# Altium PCB MagnetorquerFinalBoard.PcbDoc
Units mm, origin at the board's own origin, x right, y up, seen from the top; angles counter-clockwise.
Board outline 90.17 x 95.88 mm, 4 copper layers (F.Cu, In1.Cu, In2.Cu, B.Cu); 63 components, 137 nets, 364 pads, 76 vias.
Unrouted connection lines stored in the file: 51.
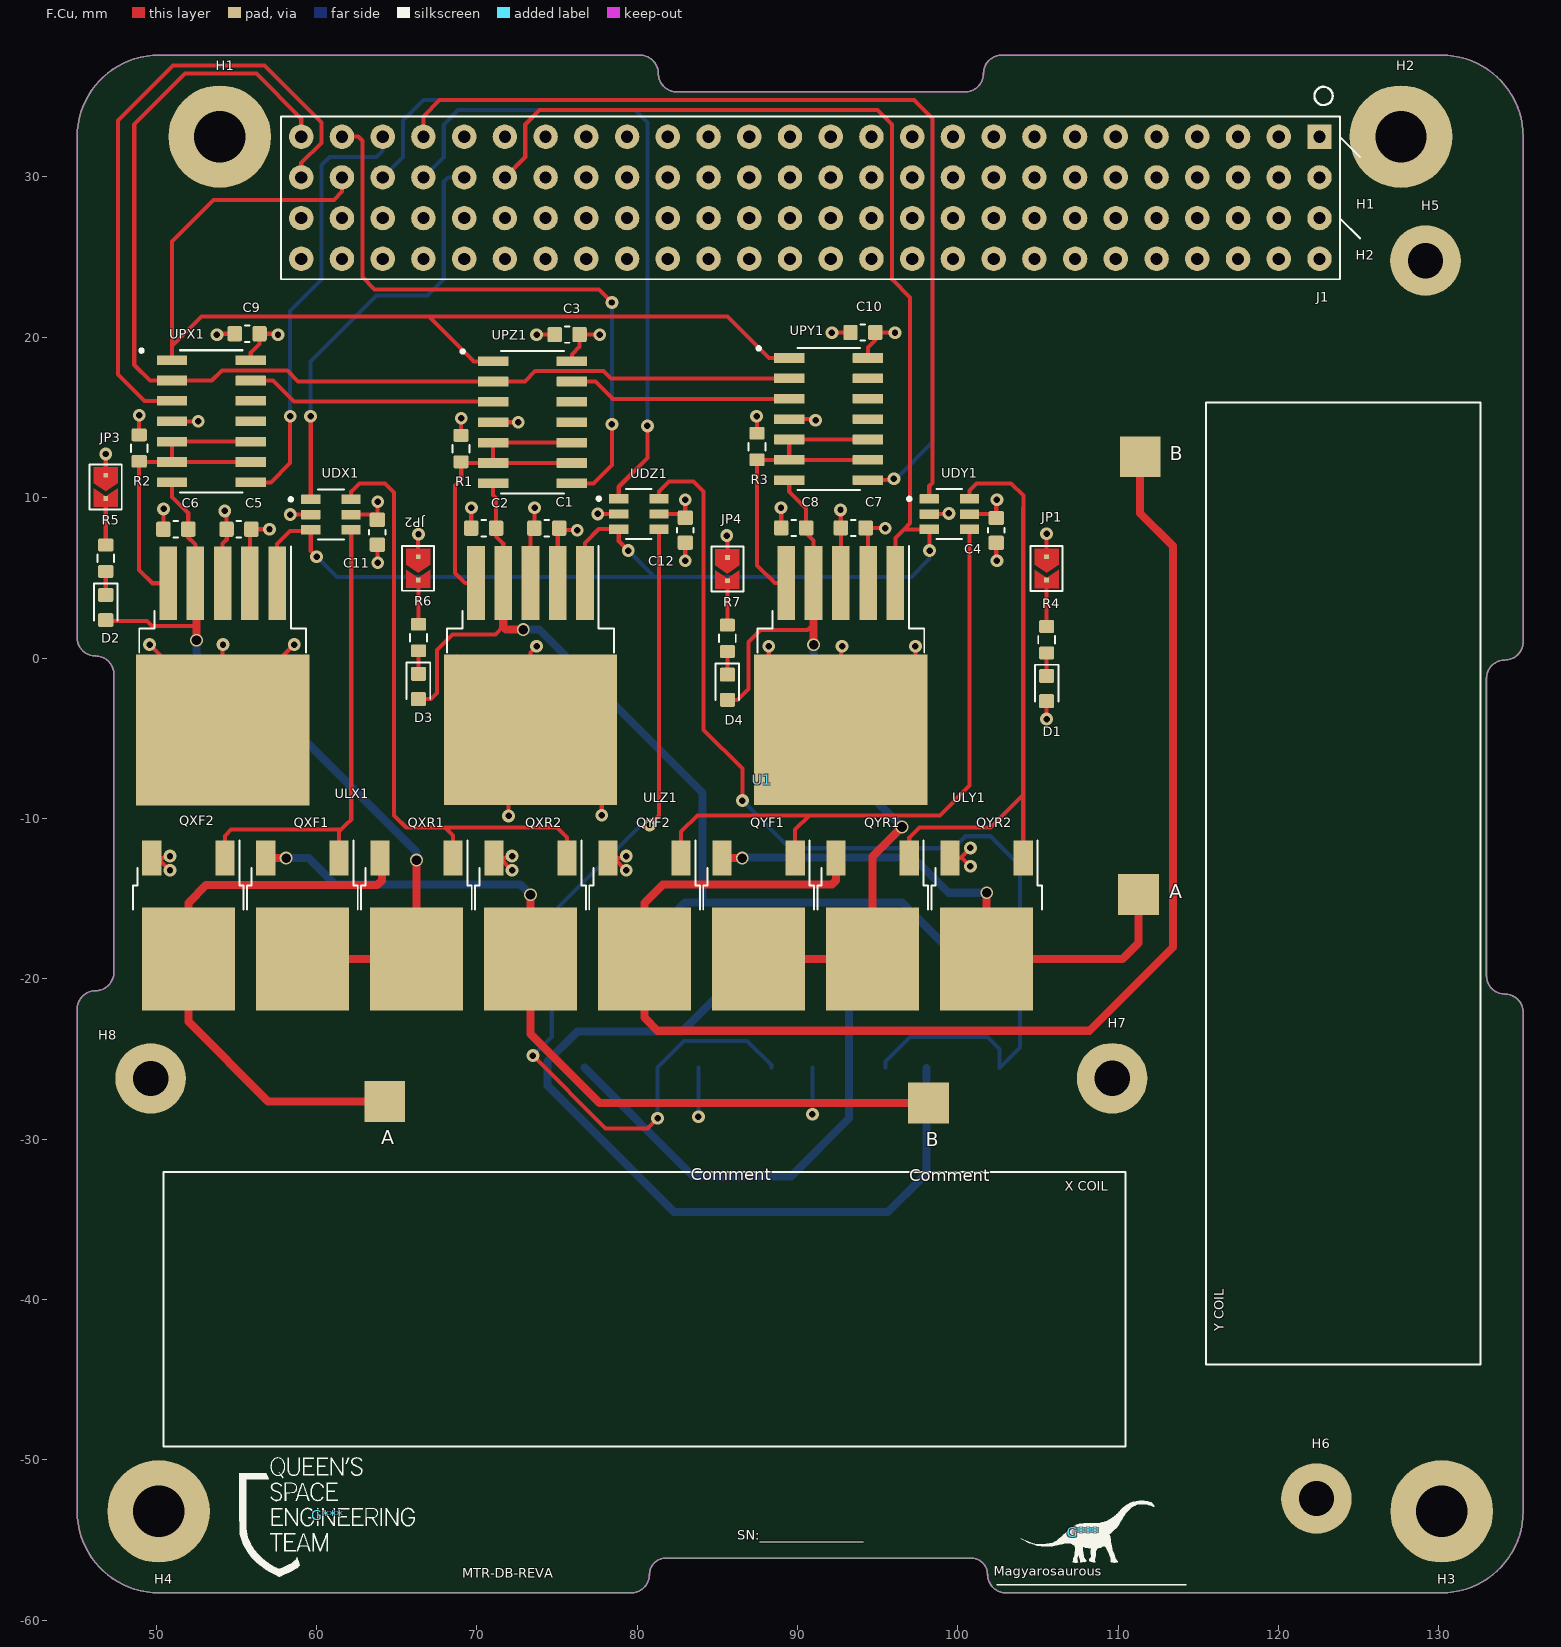
[diagram p0: F.Cu view]
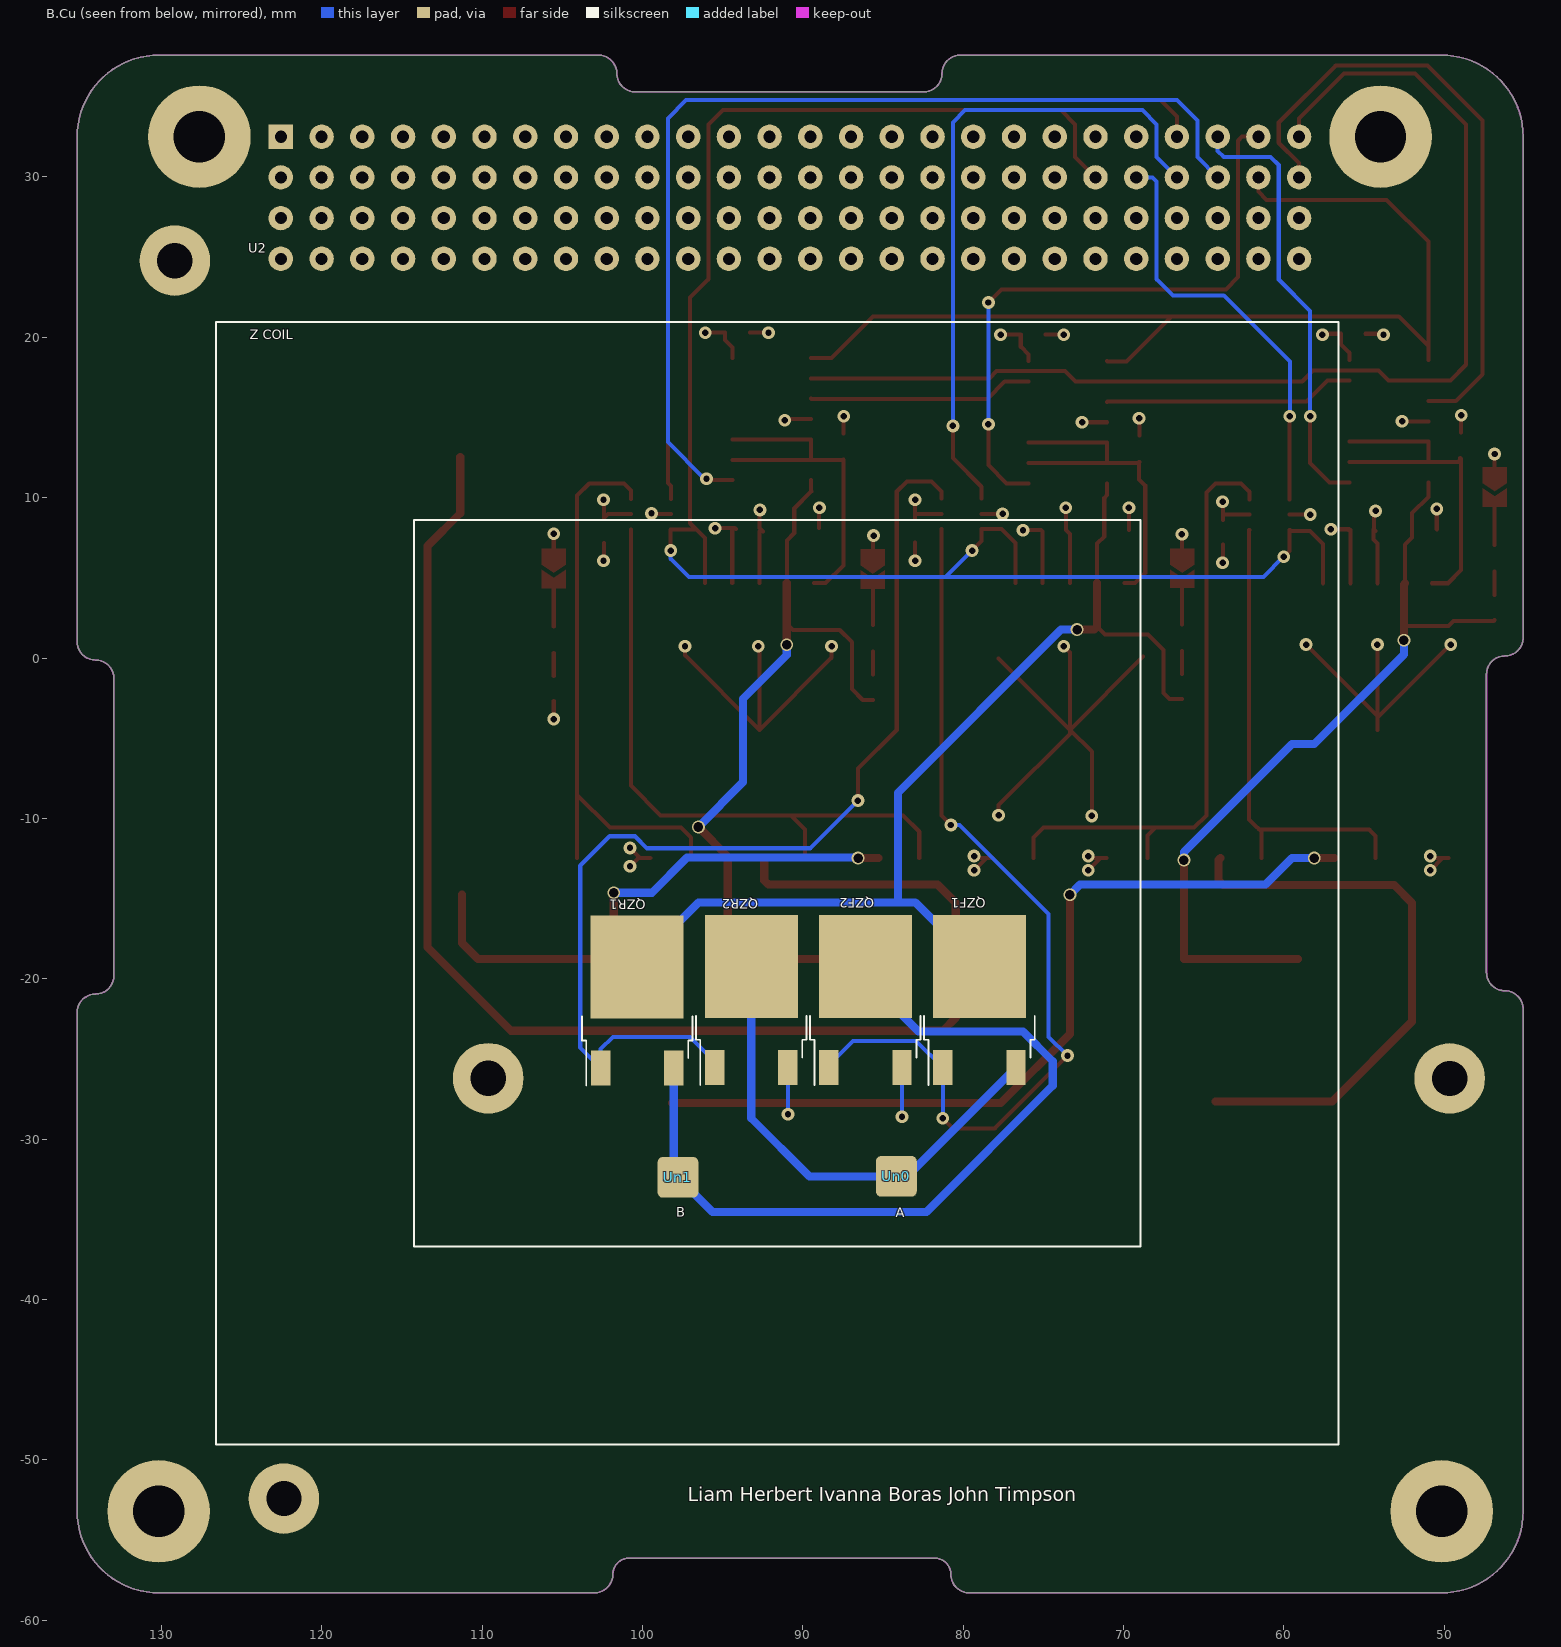
[diagram p1: B.Cu view, seen from below]
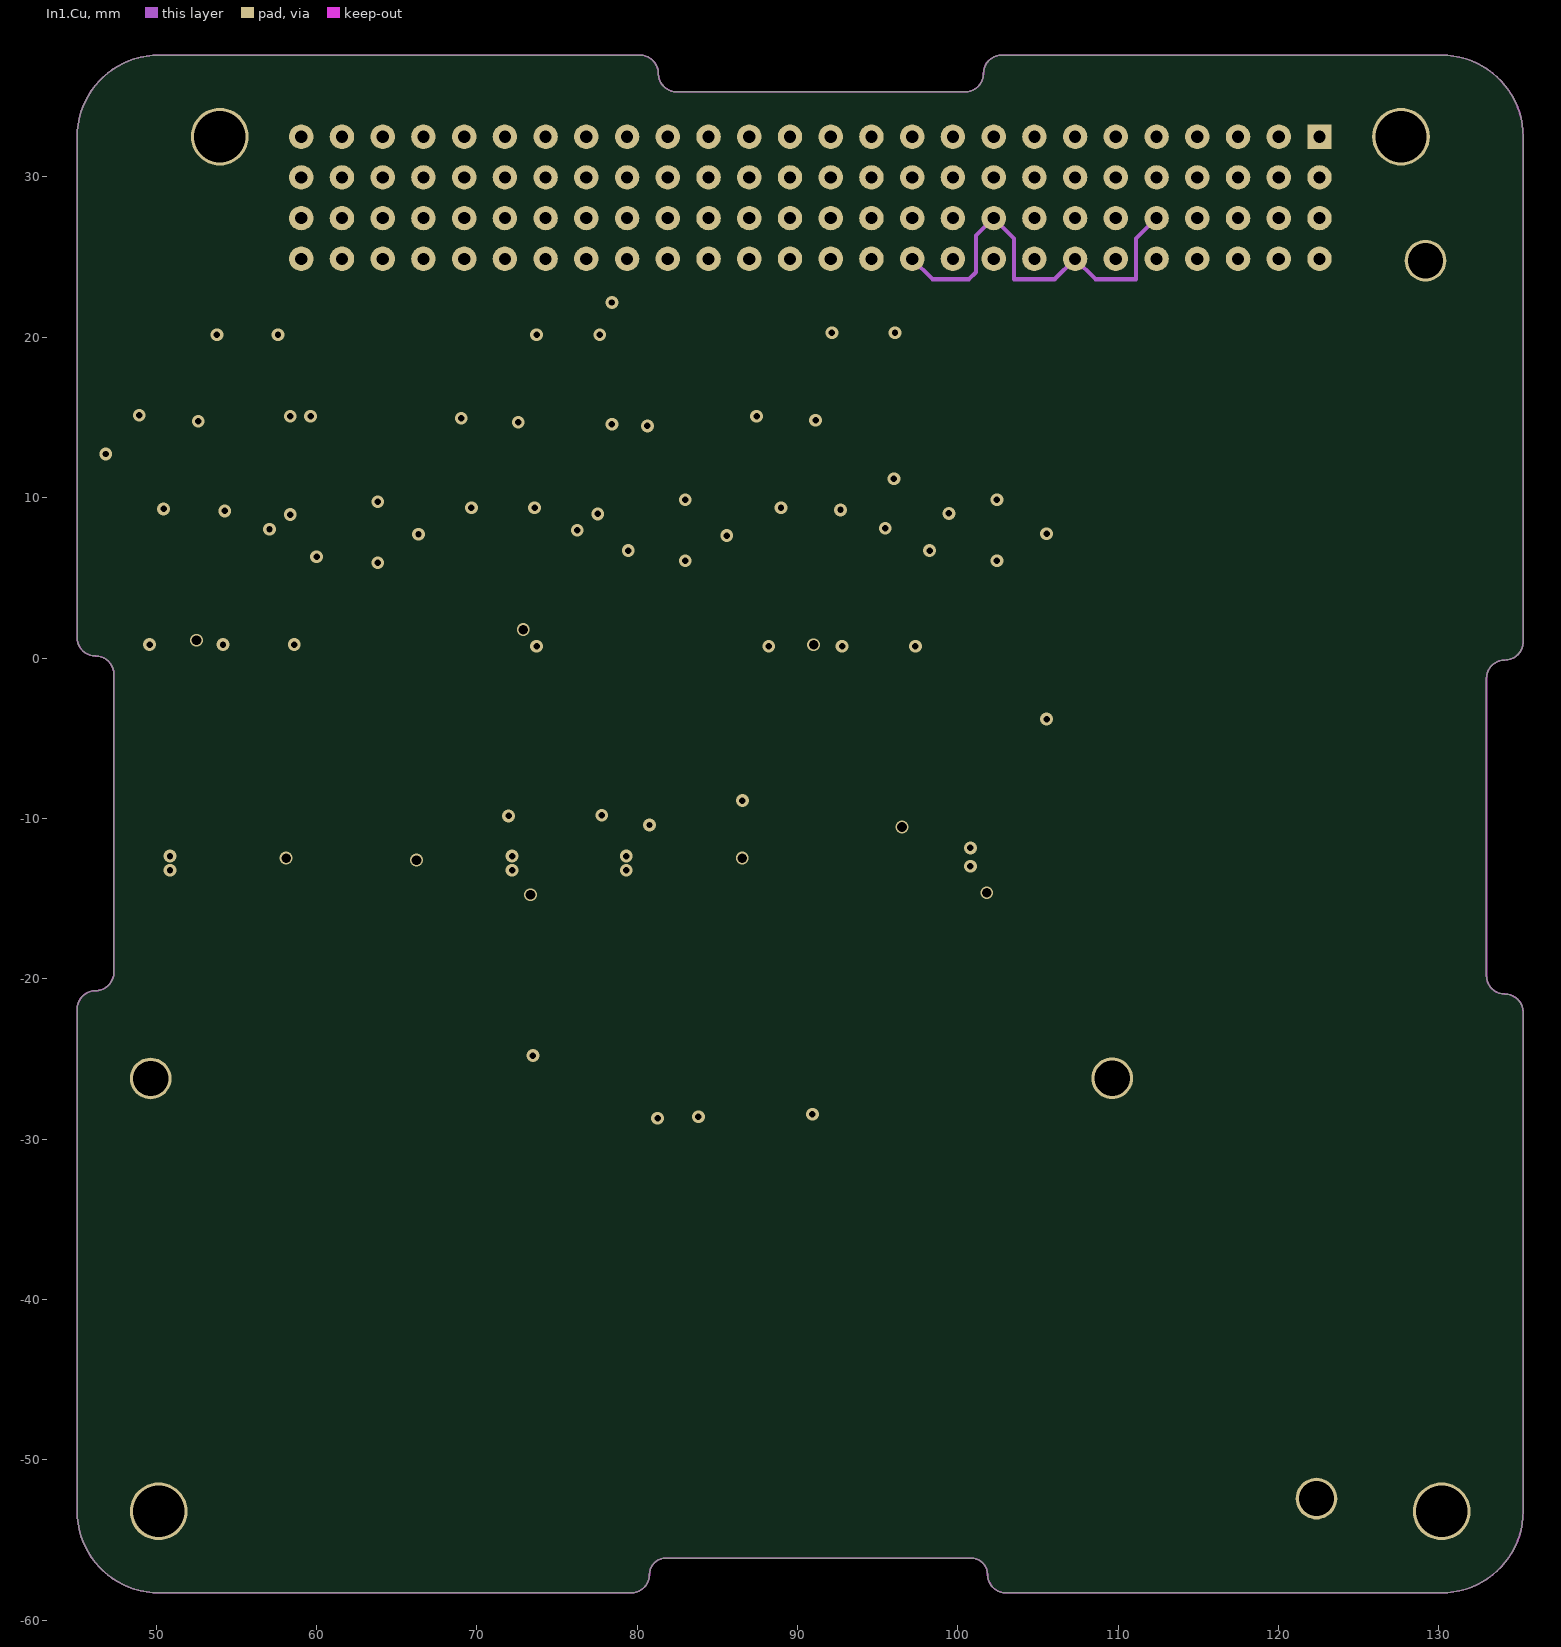
[diagram p2: In1.Cu]

## Layer stack, top to bottom
F.Mask: solder mask 0.0102, Solder Resist, Dk 3.5
F.Cu: signal copper 0.0356
Dielectric 1: dielectric 0.32, FR-4, Dk 4.8
In1.Cu: signal copper 0.0356
Dielectric2: dielectric 0.32, FR-4, Dk 4.8
In2.Cu: signal copper 0.0356
Dielectric3: dielectric 0.32, FR-4, Dk 4.8
B.Cu: signal copper 0.0356
B.Mask: solder mask 0.0102, Solder Resist, Dk 3.5

## Board outline
45.085,1.27 45.085,32.512 cw(c50.165,32.512) 50.165,37.592 80.183,37.592 cw(c80.183,36.449) 81.326,36.449 ccw(c82.469,36.449) 82.469,35.306 100.457,35.306 ccw(c100.457,36.449) 101.6,36.449 cw(c102.743,36.449) 130.175,37.592 cw(c130.175,32.512) 135.255,32.512 135.255,1.016 cw(c134.112,1.016) 134.112,-0.127 ccw(c134.112,-1.27) 132.969,-1.27 132.969,-19.812 ccw(c134.111,-19.81) 134.113,-20.953 134.112,-20.955 cw(c134.112,-22.098) 135.255,-22.098 135.255,-53.213 cw(c130.175,-53.213) 130.175,-58.293 102.997,-58.293 cw(c102.997,-57.15) 101.854,-57.15 ccw(c100.838,-57.15) 100.838,-56.134 81.788,-56.134 ccw(c81.788,-57.15) 80.772,-57.15 cw(c79.629,-57.15) 79.629,-58.293 50.165,-58.293 cw(c50.165,-53.213) 45.085,-53.213 45.085,-21.89 cw(c46.228,-21.89) 46.228,-20.747 ccw(c46.228,-19.604) 47.371,-19.604 47.371,-1.016 ccw(c46.228,-1.016) 46.228,0.127 cw(c46.228,1.27) 45.085,1.27

## Design rules (kind name [scope] priority, off if disabled: settings)
Clearance "Clearence 0.508_Polygon" [InNamedPolygon('In1.Cu-GND') OR InNamedPolygon('In2.Cu-5V')] p1: gap=0.508 ignorepadtopadclearanceinfootprint=FALSE
MinimumSolderMaskSliver [All] p1: minsoldermaskwidth=0
PolygonConnect Polygon_In2.Cu-5V_ConnectDirect [IsNamedPolygon('In2.Cu-5V') vs IsVia] p1: connectstyle=Direct reliefconductorwidth=0.254 reliefentries=4 polygonreliefangle="90 Angle" airgapwidth=0.254
PolygonConnect Polygon_In2.Cu-5V_ConnectRelief45 [IsNamedPolygon('In2.Cu-5V') vs (IsThruPin or IsSMTPin) and (PadShape_AllLayers = 'Round')] p2: connectstyle=Relief reliefconductorwidth=0.508 reliefentries=4 polygonreliefangle="45 Angle" airgapwidth=0.508
PolygonConnect Polygon_In2.Cu-5V_ConnectRelief90 [IsNamedPolygon('In2.Cu-5V') vs (IsThruPin or IsSMTPin) and (PadShape_AllLayers <> 'Round')] p3: connectstyle=Relief reliefconductorwidth=0.508 reliefentries=4 polygonreliefangle="90 Angle" airgapwidth=0.508
PolygonConnect Polygon_In1.Cu-GND_ConnectDirect [IsNamedPolygon('In1.Cu-GND') vs IsVia] p4: connectstyle=Direct reliefconductorwidth=0.254 reliefentries=4 polygonreliefangle="90 Angle" airgapwidth=0.254
PolygonConnect Polygon_In1.Cu-GND_ConnectRelief45 [IsNamedPolygon('In1.Cu-GND') vs (IsThruPin or IsSMTPin) and (PadShape_AllLayers = 'Round')] p5: connectstyle=Relief reliefconductorwidth=0.508 reliefentries=4 polygonreliefangle="45 Angle" airgapwidth=0.508
PolygonConnect Polygon_In1.Cu-GND_ConnectRelief90 [IsNamedPolygon('In1.Cu-GND') vs (IsThruPin or IsSMTPin) and (PadShape_AllLayers <> 'Round')] p6: connectstyle=Relief reliefconductorwidth=0.508 reliefentries=4 polygonreliefangle="90 Angle" airgapwidth=0.508
RoutingVias [All] p1: holewidth=0.711 width=1.27 viastyle="Through Hole" minholewidth=0.711 minwidth=1.27 maxholewidth=0.711 maxwidth=1.27
SilkToSilkClearance [All] p1: silktosilkclearance=0
SilkToSolderMaskClearance [IsPad] p1: minsilkscreentomaskgap=0 clearancetoexposedcopper=TRUE
SolderMaskExpansion [All] p1: expansion=0.102 istentingtop=FALSE
Width [All] p1: maxlimit=10 minlimit=0.254 preferedwidth=0.254 minimp=50.000000 maximp=50.000000 favimp=50.000000
27 further rules are at their usual default settings.

## Components (designator, comment, footprint, x,y, rotation, side; value= is the part's Value field where it differs from the comment)
C1 "0.1u" C_0603_1608Metric 74.368,8.097 r180 top
C2 "10u" C_0603_1608Metric 70.431,8.097 r180 top
C3 "0.1u" C_0603_1608Metric 75.638,20.169 r180 top
C4 "0.1u" C_0603_1608Metric 102.395,7.957 r270 top
C5 "0.1u" C_0603_1608Metric 55.172,8.032 r180 top
C6 "10u" C_0603_1608Metric 51.235,8.032 r180 top
C7 "0.1u" C_0603_1608Metric 93.477,8.109 r180 top
C8 "10u" C_0603_1608Metric 89.765,8.109 r180 top
C9 "0.1u" C_0603_1608Metric 55.68,20.224 r180 top
C10 "0.1u" C_0603_1608Metric 94.083,20.301 r180 top
C11 "0.1u" C_0603_1608Metric 63.799,7.843 r270 top
C12 "0.1u" C_0603_1608Metric 83.004,7.97 r270 top
D1 "ORANGE" LED_0603_1608Metric 105.537,-1.905 r270 top
D2 "ORANGE" LED_0603_1608Metric 46.863,3.15 r270 top
D3 "ORANGE" LED_0603_1608Metric 66.367,-1.772 r270 top
D4 "ORANGE" LED_0603_1608Metric 85.631,-1.821 r270 top
G*** "LOGO" LOGO 107.821,-54.525 r0 top
G*** "LOGO" LOGO 60.706,-53.467 r0 top
H1 "MountingHole_Pad" MountingHole_3.2mm_M3_Pad_TopBottom 53.975,32.512 r0 top
H2 "MountingHole_Pad" MountingHole_3.2mm_M3_Pad_TopBottom 127.635,32.512 r0 top
H3 "MountingHole_Pad" MountingHole_3.2mm_M3_Pad_TopBottom 130.175,-53.213 r0 top
H4 "MountingHole_Pad" MountingHole_3.2mm_M3_Pad_TopBottom 50.165,-53.213 r0 top
H5 "MountingHole_Pad" MountingHole_2.2mm_M2_Pad_TopBottom 129.165,24.782 r0 top
H6 "MountingHole_Pad" MountingHole_2.2mm_M2_Pad_TopBottom 122.365,-52.418 r0 top
H7 "MountingHole_Pad" MountingHole_2.2mm_M2_Pad_TopBottom 109.625,-26.208 r0 top
H8 "MountingHole_Pad" MountingHole_2.2mm_M2_Pad_TopBottom 49.665,-26.218 r0 top
J1 "PC104_Connector" pc104-connector 92.075,29.972 r270 top
JP1 "SolderJumper_2_Open" SolderJumper-2_P1.3mm_Open_TrianglePad1.0x1.5mm 105.537,5.588 r270 top
JP2 "SolderJumper_2_Open" SolderJumper-2_P1.3mm_Open_TrianglePad1.0x1.5mm 66.348,5.594 r270 top
JP3 "SolderJumper_2_Open" SolderJumper-2_P1.3mm_Open_TrianglePad1.0x1.5mm 46.863,10.668 r270 top
JP4 "SolderJumper_2_Open" SolderJumper-2_P1.3mm_Open_TrianglePad1.0x1.5mm 85.631,5.545 r270 top
QXF1 "IRLR120N" TO-252-2#1 59.128,-16.668 r270 top
QXF2 "IRLR120N" TO-252-2#2 52.016,-16.668 r270 top
QXR1 "IRLR120N" TO-252-2#2 66.24,-16.668 r270 top
QXR2 "IRLR120N" TO-252-2#3 73.352,-16.668 r270 top
QYF1 "IRLR120N" TO-252-2#4 87.576,-16.668 r270 top
QYF2 "IRLR120N" TO-252-2#5 80.464,-16.668 r270 top
QYR1 "IRLR120N" TO-252-2#6 94.688,-16.668 r270 top
QYR2 "IRLR120N" TO-252-2#7 101.8,-16.668 r270 top
QZF1 "IRLR120N" TO-252-2#8 78.994,-21.336 r270 bottom
QZF2 "IRLR120N" TO-252-2#9 86.106,-21.336 r270 bottom
QZR1 "IRLR120N" TO-252-2#10 100.332,-21.371 r270 bottom
QZR2 "IRLR120N" TO-252-2#11 93.22,-21.336 r270 bottom
R1 "100k" R_0603_1608Metric 69.015,13.057 r270 top
R2 "100k" R_0603_1608Metric 48.949,13.093 r270 top
R3 "100k" R_0603_1608Metric 87.479,13.189 r270 top
R4 "2k2" R_0603_1608Metric 105.537,1.143 r90 top
R5 "2k2" R_0603_1608Metric 46.863,6.223 r90 top
R6 "2k2" R_0603_1608Metric 66.367,1.276 r90 top
R7 "2k2" R_0603_1608Metric 85.631,1.227 r90 top
U1 "X/Y_Coils" "Front Coils Mount" 132.47,20.947 r180 top
U2 "Z_Coil" ZCoil 126.59,20.955 r0 bottom
UDX1 "SN74LVC1G18DBVR" SOT95P280X145-6N 60.906,8.944 r0 top
UDY1 "SN74LVC1G18DBVR" SOT95P280X145-6N 99.474,8.974 r0 top
UDZ1 "SN74LVC1G18DBVR" SOT95P280X145-6N 80.112,8.986 r0 top
ULX1 "MIC29302WU" TO-263-5_TabPin3#1 54.156,-1.112 r270 top
ULY1 "MIC29302WU" TO-263-5_TabPin3#2 92.705,-1.101 r270 top
ULZ1 "MIC29302WU" TO-263-5_TabPin3#3 73.352,-1.101 r270 top
Un0 "Comment" ?#1 84.17,-32.325 r0 top
Un1 "Comment" ?#2 97.79,-32.385 r0 top
UPX1 "MCP42010" SOIC127P600X175-14N 53.451,14.763 r0 top
UPY1 "MCP42010" SOIC127P600X175-14N 91.943,14.901 r0 top
UPZ1 "MCP42010" SOIC127P600X175-14N 73.479,14.703 r0 top

## Footprints (in the part's own frame and the unit in brackets; to place one, negate y for a bottom-side part, rotate by r counter-clockwise, add the part's x,y. Pads: shape width x height; smd on the part's side, far side on the other; paste and mask are expansions set on the pad)
C_0603_1608Metric [mm]
  rrect25% 0.9x0.95 smd mask+0: 1(-0.775,0) 2(0.775,0)
  silkscreen extent -0.14,-0.51 0.14,0.51
"Front Coils Mount" [mm]
  rect 2.54x2.54 smd mask+0: 1(34.3,48.7) 2(68.2,48.6) 3(21.2,35.7) 4(21.1,8.4)
  silkscreen extent -0.12,5 82,70.12
LED_0603_1608Metric [mm]
  rrect25% 0.875x0.95 smd mask+0: 1(-0.787,0) 2(0.787,0)
  silkscreen extent -1.49,-0.73 0.8,0.73
LOGO [mm]
  silkscreen extent -3.93,-1.89 4.44,1.97
MountingHole_2.2mm_M2_Pad_TopBottom [mm]
  round 4.4 smd paste-4.4 mask+0: 1(0,0)
  round 4.4 smd far side paste-4.4 mask+0: 1(0,0)
  round 2.6 hole 2.2 paste-2539.97 mask+0: 1(0,0)
MountingHole_3.2mm_M3_Pad_TopBottom [mm]
  round 6.4 smd paste-6.4 mask+0: 1(0,0)
  round 6.4 smd far side paste-6.4 mask+0: 1(0,0)
  round 3.6 hole 3.2 paste-2539.97 mask+0: 1(0,0)
pc104-connector [mil]
  rect 60x60 hole 30 paste-99999 mask+0: 1(-100,1200)
  round 60 hole 30 paste-99999 mask+0: 2(0,1200) 3(-100,1100) 4(0,1100) 5(-100,1000) 6(0,1000) 7(-100,900) 8(0,900) 9(-100,800) 10(0,800) 11(-100,700) 12(0,700) 13(-100,600) 14(0,600) 15(-100,500) 16(0,500) 17(-100,400) 18(0,400) 19(-100,300) 20(0,300) 21(-100,200) 22(0,200) 23(-100,100) 24(0,100) 25(-100,0) 26(0,0) 27(-100,-100) 28(0,-100) 29(-100,-200) 30(0,-200) 31(-100,-300) 32(0,-300) 33(-100,-400) 34(0,-400) 35(-100,-500) 36(0,-500) 37(-100,-600) 38(0,-600) 39(-100,-700) 40(0,-700) 41(-100,-800) 42(0,-800) 43(-100,-900) 44(0,-900) 45(-100,-1000) 46(0,-1000) 47(-100,-1100) 48(0,-1100) 49(-100,-1200) 50(0,-1200) 51(-100,-1300) 52(0,-1300) 53(100,1200) 54(200,1200) 55(100,1100) 56(200,1100) 57(100,1000) 58(200,1000) 59(100,900) 60(200,900) 61(100,800) 62(200,800) 63(100,700) 64(200,700) 65(100,600) 66(200,600) 67(100,500) 68(200,500) 69(100,400) 70(200,400) 71(100,300) 72(200,300) 73(100,200) 74(200,200) 75(100,100) 76(200,100) 77(100,0) 78(200,0) 79(100,-100) 80(200,-100) 81(100,-200) 82(200,-200) 83(100,-300) 84(200,-300) 85(100,-400) 86(200,-400) 87(100,-500) 88(200,-500) 89(100,-600) 90(200,-600) 91(100,-700) 92(200,-700) 93(100,-800) 94(200,-800) 95(100,-900) 96(200,-900) 97(100,-1000) 98(200,-1000) 99(100,-1100) 100(200,-1100) 101(100,-1200) 102(200,-1200) 103(100,-1300) 104(200,-1300)
  silkscreen extent -150,-1350 250,1300
R_0603_1608Metric [mm]
  rrect25% 0.8x0.95 smd mask+0: 1(-0.825,0) 2(0.825,0)
  silkscreen extent -0.24,-0.52 0.24,0.52
SOIC127P600X175-14N [mm]
  rrect7% 1.9x0.6 smd mask+0: 1(-2.455,3.81) 2(-2.455,2.54) 3(-2.455,1.27) 4(-2.455,0) 5(-2.455,-1.27) 6(-2.455,-2.54) 7(-2.455,-3.81) 8(2.455,-3.81) 9(2.455,-2.54) 10(2.455,-1.27) 11(2.455,0) 12(2.455,1.27) 13(2.455,2.54) 14(2.455,3.81)
  silkscreen extent -4.45,-4.43 1.95,4.51
SolderJumper-2_P1.3mm_Open_TrianglePad1.0x1.5mm [mm]
  rect 0.3x0.3 smd paste-0.3 mask+0: 1(-0.725,0) 2(0.725,0)
  F.Cu region: 1.225,-0.75 0.075,-0.75 0.575,0 0.075,0.75 1.225,0.75
  F.Cu region: 0.275,0 -0.225,-0.75 -1.225,-0.75 -1.225,0.75 -0.225,0.75
  silkscreen extent -1.4,-1 1.4,1
SOT95P280X145-6N [mm]
  rrect7% 1.21x0.58 smd mask+0: 1(-1.255,0.95) 2(-1.255,0) 3(-1.255,-0.95) 4(1.255,-0.95) 5(1.255,0) 6(1.255,0.95)
  silkscreen extent -2.6,-1.56 0.8,1.56
TO-252-2#1 [mm]
  rect 2.2x1.2 smd mask+0: 1(-4.2,2.28) 3(-4.2,-2.28)
  rect 6.4x5.8 smd paste-6.4 mask+0: 2(2.1,0)
  rect 3.05x2.75 on Top Paste mask-3.05: Un1(0.425,1.525) Un2(3.775,1.525) Un3(3.775,-1.525) Un4(0.425,-1.525)
  silkscreen extent -5.3,-3.45 -0.97,3.45
TO-252-2#2 [mm]
  rect 2.2x1.2 smd mask+0: 1(-4.2,2.28) 3(-4.2,-2.28)
  rect 6.4x5.8 smd paste-6.4 mask+0: 2(2.1,0)
  rect 3.05x2.75 on Top Paste mask-3.05: Un1(0.425,-1.525) Un2(3.775,-1.525) Un3(0.425,1.525) Un4(3.775,1.525)
  silkscreen extent -5.3,-3.45 -0.97,3.45
TO-252-2#3 [mm]
  rect 2.2x1.2 smd mask+0: 1(-4.2,2.28) 3(-4.2,-2.28)
  rect 6.4x5.8 smd paste-6.4 mask+0: 2(2.1,0)
  rect 3.05x2.75 on Top Paste mask-3.05: Un1(3.775,1.525) Un2(3.775,-1.525) Un3(0.425,-1.525) Un4(0.425,1.525)
  silkscreen extent -5.3,-3.45 -0.97,3.45
TO-252-2#4 [mm]
  rect 2.2x1.2 smd mask+0: 1(-4.2,2.28) 3(-4.2,-2.28)
  rect 6.4x5.8 smd paste-6.4 mask+0: 2(2.1,0)
  rect 3.05x2.75 on Top Paste mask-3.05: Un1(0.425,-1.525) Un2(0.425,1.525) Un3(3.775,1.525) Un4(3.775,-1.525)
  silkscreen extent -5.3,-3.45 -0.97,3.45
TO-252-2#5 [mm]
  rect 2.2x1.2 smd mask+0: 1(-4.2,2.28) 3(-4.2,-2.28)
  rect 6.4x5.8 smd paste-6.4 mask+0: 2(2.1,0)
  rect 3.05x2.75 on Top Paste mask-3.05: Un1(3.775,1.525) Un2(0.425,1.525) Un3(0.425,-1.525) Un4(3.775,-1.525)
  silkscreen extent -5.3,-3.45 -0.97,3.45
TO-252-2#6 [mm]
  rect 2.2x1.2 smd mask+0: 1(-4.2,2.28) 3(-4.2,-2.28)
  rect 6.4x5.8 smd paste-6.4 mask+0: 2(2.1,0)
  rect 3.05x2.75 on Top Paste mask-3.05: Un1(3.775,-1.525) Un2(0.425,-1.525) Un3(0.425,1.525) Un4(3.775,1.525)
  silkscreen extent -5.3,-3.45 -0.97,3.45
TO-252-2#7 [mm]
  rect 2.2x1.2 smd mask+0: 1(-4.2,2.28) 3(-4.2,-2.28)
  rect 6.4x5.8 smd paste-6.4 mask+0: 2(2.1,0)
  rect 3.05x2.75 on Top Paste mask-3.05: Un1(0.425,1.525) Un2(3.775,-1.525) Un3(3.775,1.525) Un4(0.425,-1.525)
  silkscreen extent -5.3,-3.45 -0.97,3.45
TO-252-2#8 [mm]
  rect 2.2x1.2 smd mask+0: 1(4.2,-2.28) 3(4.2,2.28)
  rect 6.4x5.8 smd paste-6.4 mask+0: 2(-2.1,0)
  rect 3.05x2.75 on Bottom Paste mask-3.05: Un1(-0.425,1.525) Un2(-0.425,-1.525) Un3(-3.775,-1.525) Un4(-3.775,1.525)
  silkscreen extent 0.97,-3.45 5.3,3.45
TO-252-2#9 [mm]
  rect 2.2x1.2 smd mask+0: 1(4.2,-2.28) 3(4.2,2.28)
  rect 6.4x5.8 smd paste-6.4 mask+0: 2(-2.1,0)
  rect 3.05x2.75 on Bottom Paste mask-3.05: Un1(-0.425,1.525) Un2(-3.775,-1.525) Un3(-0.425,-1.525) Un4(-3.775,1.525)
  silkscreen extent 0.97,-3.45 5.3,3.45
TO-252-2#10 [mm]
  rect 2.2x1.2 smd mask+0: 1(4.2,-2.28) 3(4.2,2.28)
  rect 6.4x5.8 smd paste-6.4 mask+0: 2(-2.1,0)
  rect 3.05x2.75 on Bottom Paste mask-3.05: Un1(-3.775,1.525) Un2(-0.425,-1.525) Un3(-3.775,-1.525) Un4(-0.425,1.525)
  silkscreen extent 0.97,-3.45 5.3,3.45
TO-252-2#11 [mm]
  rect 2.2x1.2 smd mask+0: 1(4.2,-2.28) 3(4.2,2.28)
  rect 6.4x5.8 smd paste-6.4 mask+0: 2(-2.1,0)
  rect 3.05x2.75 on Bottom Paste mask-3.05: Un1(-0.425,1.525) Un2(-0.425,-1.525) Un3(-3.775,1.525) Un4(-3.775,-1.525)
  silkscreen extent 0.97,-3.45 5.3,3.45
TO-263-5_TabPin3#1 [mm]
  rect 4.6x1.1 smd mask+0: 1(-5.775,3.4) 2(-5.775,1.7) 3(-5.775,0) 4(-5.775,-1.7) 5(-5.775,-3.4)
  rect 9.4x10.8 smd paste-10.8 mask+0: 3(3.375,0)
  rect 4.55x5.25 on Top Paste mask-5.25: Un1(0.95,-2.775) Un2(5.8,-2.775) Un3(5.8,2.775) Un4(0.95,2.775)
  silkscreen extent -8.08,-5.2 -1.45,5.2
TO-263-5_TabPin3#2 [mm]
  rect 4.6x1.1 smd mask+0: 1(-5.775,3.4) 2(-5.775,1.7) 3(-5.775,0) 4(-5.775,-1.7) 5(-5.775,-3.4)
  rect 9.4x10.8 smd paste-10.8 mask+0: 3(3.375,0)
  rect 4.55x5.25 on Top Paste mask-5.25: Un1(5.8,2.775) Un2(0.95,2.775) Un3(5.8,-2.775) Un4(0.95,-2.775)
  silkscreen extent -8.08,-5.2 -1.45,5.2
TO-263-5_TabPin3#3 [mm]
  rect 4.6x1.1 smd mask+0: 1(-5.775,3.4) 2(-5.775,1.7) 3(-5.775,0) 4(-5.775,-1.7) 5(-5.775,-3.4)
  rect 9.4x10.8 smd paste-10.8 mask+0: 3(3.375,0)
  rect 4.55x5.25 on Top Paste mask-5.25: Un1(0.95,2.775) Un2(0.95,-2.775) Un3(5.8,-2.775) Un4(5.8,2.775)
  silkscreen extent -8.08,-5.2 -1.45,5.2
ZCoil [mm]
  rrect25% 2.54x2.54 smd mask+0: 1(-42.42,53.28) 2(-28.8,53.34)
  silkscreen extent -70,0 0,70
?#1 [mm]
  rrect25% 2.54x2.54 smd far side mask+0: 1(0,0)
?#2 [mm]
  rrect25% 2.54x2.54 smd far side mask+0: 2(0,0)

## Part data
C1 C2 C3 C4 C5 C6 C7 C8 C9 C10 C11 C12: library part C_0603_1608Metric, "Capacitor SMD 0603 (1608 Metric), square (rectangular) end terminal, IPC_7351 nominal, (Body size source: IPC-SM-782 page 76, https://www.pcb-3d.com/wordpress/wp-content/uploads/ipc-sm-782a_amendment_1_and_2.pdf), generated with kicad-footprint-generator", Sheetfile=MagnetorquerFinalBoard.kicad_sch
D1 D2 D3 D4: library part LED_0603_1608Metric, "LED SMD 0603 (1608 Metric), square (rectangular) end terminal, IPC_7351 nominal, (Body size source: http://www.tortai-tech.com/upload/download/2011102023233369053.pdf), generated with kicad-footprint-generator", Sheetfile=MagnetorquerFinalBoard.kicad_sch
H1 H2 H3 H4: library part MountingHole_3.2mm_M3_Pad_TopBottom, "Mounting Hole 3.2mm, M3", Sheetfile=MagnetorquerFinalBoard.kicad_sch
H5 H6 H7 H8: library part MountingHole_2.2mm_M2_Pad_TopBottom, "Mounting Hole 2.2mm, M2", Sheetfile=MagnetorquerFinalBoard.kicad_sch
J1: library part pc104-connector, Sheetfile=MagnetorquerFinalBoard.kicad_sch
JP1 JP2 JP3 JP4: library part SolderJumper-2_P1.3mm_Open_TrianglePad1.0x1.5mm, "SMD Solder Jumper, 1x1.5mm Triangular Pads, 0.3mm gap, open", Sheetfile=MagnetorquerFinalBoard.kicad_sch
QXF1 QXF2 QXR1 QXR2 QYF1 QYF2 QYR1 QYR2 QZF1 QZF2 QZR1 QZR2: library part TO-252-2, "TO-252 / DPAK SMD package, http://www.infineon.com/cms/en/product/packages/PG-TO252/PG-TO252-3-1/", MANUFACTURER="Infineon Technologies", MAXIMUM_PACKAGE_HIEGHT=2.39mm, PARTREV="july 2014", STANDARD=IPC7351B, Sheetfile=MagnetorquerFinalBoard.kicad_sch
R1 R2 R3 R4 R5 R6 R7: library part R_0603_1608Metric, "Resistor SMD 0603 (1608 Metric), square (rectangular) end terminal, IPC_7351 nominal, (Body size source: IPC-SM-782 page 72, https://www.pcb-3d.com/wordpress/wp-content/uploads/ipc-sm-782a_amendment_1_and_2.pdf), generated with kicad-footprint-generator", Sheetfile=MagnetorquerFinalBoard.kicad_sch
U1: library part "Front Coils Mount", Sheetfile=MagnetorquerFinalBoard.kicad_sch
U2: library part ZCoil, Sheetfile=MagnetorquerFinalBoard.kicad_sch
UDX1 UDY1 UDZ1: library part SOT95P280X145-6N, Sheetfile=MagnetorquerFinalBoard.kicad_sch
ULX1 ULY1 ULZ1: library part TO-263-5_TabPin3, "TO-263 / D2PAK / DDPAK SMD package, http://www.infineon.com/cms/en/product/packages/PG-TO263/PG-TO263-5-1/", Sheetfile=MagnetorquerFinalBoard.kicad_sch
UPX1 UPY1 UPZ1: library part SOIC127P600X175-14N, Sheetfile=MagnetorquerFinalBoard.kicad_sch

## Via types
v1: diameter 0.8, hole 0.4, F.Cu to B.Cu, tented both sides, 67 vias
v2: diameter 0.8, hole 0.6, F.Cu to B.Cu, tented both sides, 9 vias

## Nets (pads, with @x,y where several pads share a name; then routed paths per layer and width w, separated by ;. In a path a pad name is that pad's centre, name@x,y a point inside that pad or via, vN(x,y) a via of type N, cw(c..) or ccw(c..) an arc to the next point about the centre after c; other vN are vias at no path point)
5V: C1.1 C3.1 C4.1 C5.1 C7.1 C9.1 C10.1 C11.1 C12.1 D1.2 J1.77 J1.78 UDX1.5 UDY1.5 UDZ1.5 ULX1.2 ULY1.2 ULZ1.2 UPX1.14 UPY1.14 UPZ1.14 | length 32.5
  F.Cu w0.254: ULX1.2 C5.1@55.856,7.996 ; UPX1.14 55.905,19.035 56.461,19.59 56.461,20.218 C9.1 57.542,20.224 v1(57.604,20.162) ; C5.1@55.983,7.996 C5.1 v1(57.077,8.032) ; UDX1.5 63.786,8.944 C11.1@63.799,8.931 ; C11.1 63.799,9.72 v1(63.827,9.748) ; ULZ1.2 75.052,7.886 75.143,7.977 76.266,7.977 v1(76.273,7.97) ; UPZ1.14 75.934,18.934 76.413,19.413 C3.1 77.663,20.169 v1(77.67,20.162) ; UDZ1.5 82.991,8.986 C12.1@83.004,8.973 ; C12.1 v1(83.004,9.875) ; C7.1@94.18,8.037 C7.1 95.467,8.109 v1(95.479,8.097) ; UPY1.14 94.398,19.364 94.858,19.824 C10.1 96.073,20.301 v1(96.085,20.289) ; ULY1.2 C7.1@94.405,8.037 ; UDY1.5 102.153,8.974 C4.1 102.395,9.835 v1(102.435,9.875) ; v1(105.537,-3.81) D1.2
Enable: J1.42 UDX1.3 UDY1.3 UDZ1.3 ULX1.1 ULY1.1 ULZ1.1 | length 115.2
  F.Cu w0.254: ULX1.1 57.556,7.118 58.366,7.928 59.585,7.928 UDX1.3 ; UDX1.3@59.636,7.979 UDX1.3 ; v1(60.017,6.319) 59.651,6.685 UDX1.3 ; J1.42 73.025,31.242 73.025,33.274 73.914,34.163 94.996,34.163 95.885,33.274 95.885,23.622 97.028,22.479 97.028,8.405 96.647,8.024 ; ULZ1.1 76.752,7.179 77.609,8.036 UDZ1.3 78.856,7.291 v1(79.448,6.7) ; ULY1.1 96.105,7.482 96.647,8.024 ; v1(98.244,6.7) 98.244,7.999 UDY1.3 96.647,8.024
  B.Cu w0.254: v1(60.017,6.319) 61.287,5.049 81.099,5.049 ; v1(79.448,6.7) 81.099,5.049 ; v1(98.244,6.7) 98.244,6.192 97.101,5.049 81.099,5.049
GND: C1.2 C2.2 C3.2 C4.2 C5.2 C6.2 C7.2 C8.2 C9.2 C10.2 C11.2 C12.2 J1.61 J1.66 J1.69 J1.73 J1.74 J1.81 J1.82 J1.84 J1.99 J1.100 JP1.1 JP2.1 JP3.1 JP4.1 QXF2.3 QXR2.3 QYF2.3 QYR2.3 QZF2.3 QZR2.3 R1.1 R2.1 R3.1 UDX1.2 UDY1.2 UDZ1.2 ULX1.3 ULY1.3 ULZ1.3 UPX1.4 UPY1.4 UPZ1.4 | length 155.7
  F.Cu w0.254: JP3.1 v1(46.863,12.723) ; R2.1@48.949,14.064 48.949,15.017 v1(48.949,15.144) ; v1(49.603,0.835) 54.156,-3.718 ULX1.3@54.156,-4.487 ; C6.2 50.473,8.045 v1(50.473,9.302) ; v1(50.873,-13.239) 50.102,-12.468 QXF2.3 50.755,-12.468 v1(50.873,-12.35) ; UPX1.4 v1(52.632,14.763) ; v1(53.794,20.162) 53.856,20.224 C9.2 ; ULX1.3@54.156,4.663 54.156,7.143 54.41,7.397 54.41,8.019 C5.2 ; v1(54.175,0.835) 54.156,0.816 ULX1.3@54.156,-4.487 ; C5.2@54.283,7.918 C5.2 ; v1(54.283,9.175) 54.397,9.061 C5.2 ; v1(58.366,8.944) UDX1.2 ; v1(58.62,0.835) 54.156,-3.629 ULX1.3@54.156,-4.487 ; C11.2 63.799,5.967 v1(63.827,5.938) ; JP2.1 66.348,7.697 v1(66.367,7.716) ; ULZ1.3@68.78,0.096 ULZ1.3@73.352,-4.476 ; R1.1 69.015,14.936 v1(69.034,14.955) ; C2.2@69.656,7.977 69.656,9.354 v1(69.669,9.367) ; UPZ1.4 72.588,14.703 v1(72.59,14.701) ; v1(71.985,-9.845) 71.985,-5.843 ULZ1.3@73.352,-4.476 ; v1(72.209,-13.239) 71.438,-12.468 QXR2.3 72.091,-12.468 v1(72.209,-12.35) ; ULZ1.3@73.352,4.674 73.352,7.736 73.593,7.977 73.593,9.354 v1(73.606,9.367) ; v1(73.733,0.731) 73.352,0.35 ULZ1.3@73.352,-4.476 ; v1(73.733,20.162) 73.74,20.169 C3.2 ; v1(77.543,8.986) UDZ1.2 ; v1(77.797,-9.81) 77.797,-9.175 77.543,-8.921 73.352,-4.73 ULZ1.3@73.352,-4.476 ; ULZ1.3@77.797,-0.031 ULZ1.3@73.352,-4.476 ; v1(79.321,-13.239) 78.55,-12.468 QYF2.3 79.203,-12.468 v1(79.321,-12.35) ; v1(83.004,6.065) C12.2 ; v1(85.593,7.631) 85.631,7.593 JP4.1 ; v1(87.449,15.082) 87.479,15.052 R3.1 ; v1(88.211,0.731) 88.211,0.018 ULY1.3@92.705,-4.476 ; v1(88.973,9.367) 88.99,9.35 C8.2 ; UPY1.4 91.059,14.901 v1(91.132,14.828) ; v1(92.148,20.289) 92.16,20.301 C10.2 ; C7.2@92.48,7.887 C7.2 92.702,9.223 v1(92.685,9.24) ; ULY1.3@92.705,4.674 C7.2@92.705,7.887 ; v1(92.783,0.731) 92.705,0.653 ULY1.3@92.705,-4.476 ; v1(97.355,0.731) 97.355,0.174 ULY1.3@92.705,-4.476 ; UDY1.2 99.398,8.974 v1(99.441,9.017) ; v1(100.784,-12.985) 100.267,-12.468 QYR2.3 100.158,-12.468 v1(100.784,-11.842) ; C4.2 102.395,6.105 v1(102.435,6.065) ; JP1.1 v1(105.537,7.747)
  In1.Cu w0.254: J1.74 98.425,23.622 100.711,23.622 101.146,24.057 101.146,26.343 J1.69 103.505,26.162 103.505,23.622 106.045,23.622 J1.66 108.585,23.622 111.125,23.622 111.125,26.162 J1.61
  B.Cu w0.25: v1(83.82,-28.607) 83.82,-26.936 83.826,-26.93 QZF2.3 ; v1(90.932,-28.448) 90.94,-28.44 QZR2.3
Net-(D1-Pad1): D1.1 R4.1 | length 1.4
  F.Cu w0.254: D1.1 R4.1
Net-(D2-Pad1): D2.1 R5.1 | length 1.5
  F.Cu w0.254: D2.1 R5.1
Net-(D3-Pad1): D3.1 R6.1 | length 1.4
  F.Cu w0.254: D3.1 R6.1
Net-(D4-Pad1): D4.1 R7.1 | length 1.4
  F.Cu w0.254: D4.1 R7.1
Net-(R4-Pad2): JP1.2 R4.2 | length 2.9
  F.Cu w0.254: R4.2 JP1.2
Net-(R5-Pad2): JP3.2 R5.2 | length 2.9
  F.Cu w0.254: R5.2 JP3.2
Net-(R6-Pad2): JP2.2 R6.2 | length 2.8
  F.Cu w0.254: JP2.2 66.367,4.85 R6.2
Net-(R7-Pad2): JP4.2 R7.2 | length 2.8
  F.Cu w0.254: R7.2 JP4.2
SCK: J1.51 UPX1.2 UPY1.2 UPZ1.2 | length 71.3
  F.Cu w0.254: J1.51 59.055,33.655 56.261,36.449 51.816,36.449 48.641,33.274 48.641,18.288 49.626,17.303 UPX1.2 53.475,17.303 54.102,17.93 58.185,17.93 58.86,17.255 71.012,17.255 UPZ1.2 73.004,17.243 73.647,17.886 77.914,17.886 78.371,17.429 89.476,17.429 UPY1.2
SPI: J1.52 UPX1.3 | length 39.4
  F.Cu w0.254: UPX1.3 49.287,16.033 47.625,17.695 47.625,33.528 51.054,36.957 56.769,36.957 60.325,33.401 60.325,32.131 59.055,30.861 J1.52
SS: J1.50 UPX1.1 UPY1.1 UPZ1.1 | length 66.6
  F.Cu w0.254: J1.50 61.595,29.083 61.087,28.575 53.594,28.575 50.996,25.977 UPX1.1 50.996,19.459 52.841,21.305 65.732,21.305 ; 65.696,21.305 85.635,21.305 88.229,18.711 UPY1.1 ; 67.021,21.293 69.815,18.499 71.01,18.499 UPZ1.1
unconnected-(H1-Pad1): H1.1
unconnected-(H2-Pad1): H2.1
unconnected-(H3-Pad1): H3.1
unconnected-(H4-Pad1): H4.1
unconnected-(H5-Pad1): H5.1
unconnected-(H6-Pad1): H6.1
unconnected-(H7-Pad1): H7.1
unconnected-(H8-Pad1): H8.1
unconnected-(J1-Pad1): J1.1
unconnected-(J1-Pad2): J1.2
unconnected-(J1-Pad3): J1.3
unconnected-(J1-Pad4): J1.4
unconnected-(J1-Pad5): J1.5
unconnected-(J1-Pad6): J1.6
unconnected-(J1-Pad7): J1.7
unconnected-(J1-Pad8): J1.8
unconnected-(J1-Pad9): J1.9
unconnected-(J1-Pad10): J1.10
unconnected-(J1-Pad11): J1.11
unconnected-(J1-Pad12): J1.12
unconnected-(J1-Pad13): J1.13
unconnected-(J1-Pad14): J1.14
unconnected-(J1-Pad15): J1.15
unconnected-(J1-Pad16): J1.16
unconnected-(J1-Pad17): J1.17
unconnected-(J1-Pad18): J1.18
unconnected-(J1-Pad19): J1.19
unconnected-(J1-Pad20): J1.20
unconnected-(J1-Pad21): J1.21
unconnected-(J1-Pad22): J1.22
unconnected-(J1-Pad23): J1.23
unconnected-(J1-Pad24): J1.24
unconnected-(J1-Pad25): J1.25
unconnected-(J1-Pad26): J1.26
unconnected-(J1-Pad27): J1.27
unconnected-(J1-Pad28): J1.28
unconnected-(J1-Pad29): J1.29
unconnected-(J1-Pad30): J1.30
unconnected-(J1-Pad31): J1.31
unconnected-(J1-Pad32): J1.32
unconnected-(J1-Pad33): J1.33
unconnected-(J1-Pad34): J1.34
unconnected-(J1-Pad35): J1.35
unconnected-(J1-Pad36): J1.36
unconnected-(J1-Pad37): J1.37
unconnected-(J1-Pad38): J1.38
unconnected-(J1-Pad39): J1.39
unconnected-(J1-Pad40): J1.40
unconnected-(J1-Pad41): J1.41
unconnected-(J1-Pad43): J1.43
unconnected-(J1-Pad53): J1.53
unconnected-(J1-Pad54): J1.54
unconnected-(J1-Pad55): J1.55
unconnected-(J1-Pad56): J1.56
unconnected-(J1-Pad57): J1.57
unconnected-(J1-Pad58): J1.58
unconnected-(J1-Pad59): J1.59
unconnected-(J1-Pad60): J1.60
unconnected-(J1-Pad62): J1.62
unconnected-(J1-Pad63): J1.63
unconnected-(J1-Pad64): J1.64
unconnected-(J1-Pad65): J1.65
unconnected-(J1-Pad67): J1.67
unconnected-(J1-Pad68): J1.68
unconnected-(J1-Pad70): J1.70
unconnected-(J1-Pad71): J1.71
unconnected-(J1-Pad72): J1.72
unconnected-(J1-Pad75): J1.75
unconnected-(J1-Pad76): J1.76
unconnected-(J1-Pad79): J1.79
unconnected-(J1-Pad80): J1.80
unconnected-(J1-Pad83): J1.83
unconnected-(J1-Pad85): J1.85
unconnected-(J1-Pad86): J1.86
unconnected-(J1-Pad87): J1.87
unconnected-(J1-Pad88): J1.88
unconnected-(J1-Pad89): J1.89
unconnected-(J1-Pad90): J1.90
unconnected-(J1-Pad91): J1.91
unconnected-(J1-Pad92): J1.92
unconnected-(J1-Pad93): J1.93
unconnected-(J1-Pad94): J1.94
unconnected-(J1-Pad95): J1.95
unconnected-(J1-Pad96): J1.96
unconnected-(J1-Pad97): J1.97
unconnected-(J1-Pad98): J1.98
unconnected-(J1-Pad101): J1.101
unconnected-(J1-Pad102): J1.102
unconnected-(J1-Pad103): J1.103
unconnected-(J1-Pad104): J1.104
unconnected-(UPX1-Pad11): UPX1.11
unconnected-(UPX1-Pad12): UPX1.12
unconnected-(UPY1-Pad11): UPY1.11
unconnected-(UPY1-Pad12): UPY1.12
unconnected-(UPY1-Pad13): UPY1.13
unconnected-(UPZ1-Pad11): UPZ1.11
unconnected-(UPZ1-Pad12): UPZ1.12
X_COIL_A: QXF1.3 QXR2.2 U1.1 | length 52.7
  F.Cu w0.508: QXF1.3 58.103,-12.468 v2(58.112,-12.477) ; v2(73.352,-14.763) QXR2.2 73.352,-23.441 77.664,-27.753 U1.1
  B.Cu w0.508: v2(58.112,-12.477) 59.509,-12.477 61.16,-14.128 72.717,-14.128 v2(73.352,-14.763)
X_COIL_B: QXF2.2 QXR1.3 U1.2 | length 35.8
  F.Cu w0.508: QXR1.3 64.081,-12.589 64.081,-13.874 63.792,-14.163 53.124,-14.163 52.016,-15.271 QXF2.2 52.016,-22.679 56.99,-27.653 U1.2
X_FWD: QXF1.1 QXF2.1 UDX1.4 | length 30
  F.Cu w0.254: QXF2.1 54.296,-11.086 54.683,-10.699 61.541,-10.699 61.858,-10.382 ; QXF1.1 61.408,-10.832 61.858,-10.382 ; UDX1.4 62.176,7.979 62.176,-10.064 61.858,-10.382
X_REV: QXR1.1 QXR2.1 UDX1.6 | length 38.5
  F.Cu w0.254: UDX1.6 62.161,10.368 62.684,10.891 64.271,10.891 64.843,10.319 64.843,-9.81 65.605,-10.572 68.018,-10.572 ; QXR1.1 68.52,-11.074 68.018,-10.572 ; QXR2.1 75.632,-11.201 75.003,-10.572 68.018,-10.572
X_S: J1.44 UDX1.1 | length 26.5
  F.Cu w0.254: v1(59.636,15.082) 59.651,15.067 UDX1.1
  B.Cu w0.254: v1(59.636,15.082) 59.636,18.488 63.754,22.606 66.929,22.606 67.945,23.622 67.945,29.718 68.199,29.972 J1.44
X_SO: UPX1.13 UPZ1.3 | length 15.7
  F.Cu w0.254: UPX1.13 57.288,17.303 58.606,15.985 71.012,15.985 UPZ1.3
X_VADJ: R2.2 ULX1.5 UPX1.5 UPX1.6 UPX1.9 UPX1.10 | length 22.4
  F.Cu w0.254: R2.2@49.007,12.472 R2.2@48.949,12.414 ; ULX1.5 49.778,4.663 48.949,5.492 R2.2@48.949,12.414 ; UPX1.9 UPX1.6 ; UPX1.10 UPX1.5 UPX1.6 ; R2.2@48.949,12.414 49.14,12.223 UPX1.6
X_VCOIL: C6.1 D2.2 QXF1.2 QXR1.2 ULX1.4 UPX1.7 | length 49.8
  F.Cu w0.254: D2.2 46.916,2.309 49.433,2.309 49.741,2.001 52.524,2.001 ; UPX1.7 50.996,10.049 52.01,9.035 C6.1 52.01,7.511 52.456,7.065 ULX1.4
  F.Cu w0.508: ULX1.4 52.524,4.595 52.524,2.001 v2(52.524,1.112) ; QXF1.2 QXR1.2 v2(66.24,-12.604)
  B.Cu w0.508: v2(52.524,1.112) 52.524,0.223 58.112,-5.365 59.509,-5.365 66.24,-12.096 v2(66.24,-12.604)
X_VCON: J1.47 UPX1.8 | length 27.4
  F.Cu w0.254: UPX1.8 57.158,10.953 58.366,12.161 58.366,14.955 v1(58.366,15.082)
  B.Cu w0.254: v1(58.366,15.082) 58.366,21.644 60.325,23.603 60.325,30.734 60.833,31.242 63.754,31.242 64.135,31.623 J1.47
Y_COIL_A: QYF1.3 QYR2.2 U1.3 | length 34.5
  F.Cu w0.508: QYF1.3 86.551,-12.468 v2(86.56,-12.477) ; v2(101.8,-14.636) QYR2.2 110.264,-18.768 111.27,-17.762 U1.3
  B.Cu w0.508: v2(86.56,-12.477) 86.591,-12.446 97.222,-12.446 99.412,-14.636 v2(101.8,-14.636)
Y_COIL_B: QYF2.2 QYR1.3 U1.4 | length 87.9
  F.Cu w0.508: QYR1.3 92.408,-13.868 92.148,-14.128 81.607,-14.128 80.464,-15.271 QYF2.2 80.464,-22.425 81.28,-23.241 108.204,-23.241 113.411,-18.034 113.411,6.985 111.37,9.026 U1.4
Y_FWD: QYF1.1 QYF2.1 UDY1.4 | length 39.8
  F.Cu w0.254: QYF2.1 82.744,-10.832 83.766,-9.81 90.751,-9.81 ; QYF1.1 89.856,-10.705 90.751,-9.81 ; UDY1.4 100.729,-7.96 98.879,-9.81 90.751,-9.81
Y_REV: QYR1.1 QYR2.1 UDY1.6 | length 36.5
  F.Cu w0.254: QYR1.1 96.968,-12.363 96.974,-12.357 96.974,-11.207 97.609,-10.572 102.042,-10.572 104.08,-8.534 ; UDY1.6 100.729,10.455 101.165,10.891 103.324,10.891 104.086,10.129 104.086,9.367 104.08,9.361 104.08,-8.534 ; QYR2.1 104.08,-8.534
Y_S: J1.45 UDY1.1 | length 57.7
  F.Cu w0.254: J1.45 66.675,33.782 67.691,34.798 97.282,34.798 98.425,33.655 98.425,10.922 98.219,10.716 UDY1.1
Y_VADJ: R3.2 ULY1.5 UPY1.5 UPY1.6 UPY1.9 UPY1.10 | length 22
  F.Cu w0.254: ULY1.5 88.586,4.674 87.479,5.781 R3.2 87.482,12.361 UPY1.6 ; UPY1.9 UPY1.6 ; UPY1.10 UPY1.5 UPY1.6
Y_VCOIL: C8.1 D4.2 QYF1.2 QYR1.2 ULY1.4 UPY1.7 | length 52.2
  F.Cu w0.254: D4.2 86.268,-2.609 86.941,-1.936 86.941,0.985 87.703,1.747 90.624,1.747 91.005,2.128 ULY1.4 91.005,7.335 90.54,7.8 C8.1 90.54,9.324 89.481,10.383 89.488,10.39 UPY1.7
  F.Cu w0.508: QYF1.2 QYR1.2 94.688,-12.368 v2(96.52,-10.536) ; v2(91.005,0.824) ULY1.4
  B.Cu w0.508: v2(91.005,0.824) 91.005,0.181 93.726,-2.54 93.726,-7.742 v2(96.52,-10.536)
Y_VCON: J1.48 UPY1.8 | length 63.3
  F.Cu w0.254: UPY1.8 95.927,11.091 v1(96.012,11.176)
  B.Cu w0.254: J1.48 65.405,31.242 65.405,33.528 66.675,34.798 97.282,34.798 98.425,33.655 98.425,13.462 96.139,11.176 v1(96.012,11.176)
Z_COIL_A: QZF1.3 QZR2.2 U2.1 Un0.1 | length 30.3
  B.Cu w0.508: QZF1.3 83.503,-32.325 U2.1 89.595,-32.325 93.22,-28.7 QZR2.2
Z_COIL_B: QZF2.2 QZR1.3 U2.2 Un1.2 | length 50.8
  B.Cu w0.25: QZF2.2@86.106,-19.304 QZF2.2 QZF2.2@86.106,-19.05
  B.Cu w0.508: QZF2.2 86.106,-19.995 82.804,-23.297 76.271,-23.297 74.422,-25.146 74.422,-26.67 82.296,-34.544 95.631,-34.544 U2.2 98.052,-32.123 QZR1.3
Z_FWD: QZF1.1 QZF2.1 UDZ1.4 | length 58.1
  F.Cu w0.254: v1(73.501,-24.797) 78.037,-29.333 80.649,-29.333 v1(81.28,-28.702) ; v1(80.772,-10.414) 81.366,-9.82 UDZ1.4
  B.Cu w0.25: QZF1.1 82.934,-23.876 86.868,-23.876 88.386,-25.394 QZF2.1
  B.Cu w0.254: v1(73.501,-24.797) 74.676,-23.622 74.676,-15.967 80.229,-10.414 v1(80.772,-10.414) ; QZF1.1 81.274,-28.696 v1(81.28,-28.702)
Z_REV: QZR1.1 QZR2.1 UDZ1.6 | length 66.4
  F.Cu w0.254: UDZ1.6 81.366,10.396 81.988,11.018 83.512,11.018 84.147,10.383 84.147,-4.476 86.569,-6.897 v1(86.569,-8.89)
  B.Cu w0.25: QZR2.1 95.5,-25.15 97.028,-23.622 101.854,-23.622 102.612,-24.38 QZR1.1
  B.Cu w0.254: v1(86.569,-8.89) 89.543,-11.865 99.733,-11.865 100.483,-11.115 102.047,-11.115 103.886,-12.954 103.886,-24.297 QZR1.1
Z_S: J1.46 UDZ1.1 | length 41.4
  F.Cu w0.254: UDZ1.1 78.856,10.68 80.645,12.469 v1(80.645,14.478)
  B.Cu w0.254: J1.46 67.945,31.242 67.945,33.274 68.834,34.163 79.883,34.163 80.645,33.401 v1(80.645,14.478)
Z_SO: UPY1.3 UPZ1.13 | length 14
  F.Cu w0.254: UPZ1.13 77.414,17.243 78.498,16.159 89.476,16.159 UPY1.3
Z_VADJ: R1.2 ULZ1.5 UPZ1.5 UPZ1.6 UPZ1.9 UPZ1.10 | length 21.8
  F.Cu w0.254: ULZ1.5 69.282,4.674 68.653,5.303 68.653,10.764 69.034,11.145 69.034,12.213 R1.2 69.084,12.163 UPZ1.6 ; UPZ1.9 UPZ1.6 ; UPZ1.10 UPZ1.5 UPZ1.6
Z_VCOIL: C2.1 D3.2 QZF1.2 QZR1.2 ULZ1.4 UPZ1.7 | length 66.3
  F.Cu w0.254: D3.2 67.141,-2.559 67.51,-2.19 67.51,0.489 68.479,1.458 71.158,1.458 71.652,1.952 ; UPZ1.7 71.024,10.171 71.206,9.989 C2.1 71.206,7.576 71.652,7.13 ULZ1.4
  F.Cu w0.508: ULZ1.4 71.652,1.952 71.83,1.774 v2(72.898,1.774)
  B.Cu w0.508: v2(72.898,1.774) 73.897,1.774 84.074,-8.402 84.074,-15.24 ; QZF1.2 82.99,-15.24 96.52,-15.24 100.332,-19.052 QZR1.2
Z_VCON: J1.49 UPZ1.8 | length 39.4
  F.Cu w0.254: J1.49 62.611,32.512 62.865,32.258 62.865,23.749 63.627,22.987 77.616,22.987 v1(78.432,22.171) ; UPZ1.8 77.291,10.893 78.432,12.034 v1(78.432,14.574)
  B.Cu w0.254: v1(78.432,14.574) v1(78.432,22.171) v1@78.432,22.321
pads on no net: QXF1.Un1 QXF1.Un2 QXF1.Un3 QXF1.Un4 QXF2.Un1 QXF2.Un2 QXF2.Un3 QXF2.Un4 QXR1.Un1 QXR1.Un2 QXR1.Un3 QXR1.Un4 QXR2.Un1 QXR2.Un2 QXR2.Un3 QXR2.Un4 QYF1.Un1 QYF1.Un2 QYF1.Un3 QYF1.Un4 QYF2.Un1 QYF2.Un2 QYF2.Un3 QYF2.Un4 QYR1.Un1 QYR1.Un2 QYR1.Un3 QYR1.Un4 QYR2.Un1 QYR2.Un2 QYR2.Un3 QYR2.Un4 QZF1.Un1 QZF1.Un2 QZF1.Un3 QZF1.Un4 QZF2.Un1 QZF2.Un2 QZF2.Un3 QZF2.Un4 QZR1.Un1 QZR1.Un2 QZR1.Un3 QZR1.Un4 QZR2.Un1 QZR2.Un2 QZR2.Un3 QZR2.Un4 ULX1.Un1 ULX1.Un2 ULX1.Un3 ULX1.Un4 ULY1.Un1 ULY1.Un2 ULY1.Un3 ULY1.Un4 ULZ1.Un1 ULZ1.Un2 ULZ1.Un3 ULZ1.Un4

## Keep-outs
Edge.Cuts:
  lines w0.1: 45.085,-53.213 ccw(c50.165,-53.213) 50.165,-58.293 ; 45.085,-53.213 ccw(c50.165,-53.213) 50.165,-58.293 ; 45.085,-53.213 45.085,-21.89 ; 45.085,-53.213 45.085,-21.89 ; 45.085,-21.89 cw(c46.228,-21.89) 46.228,-20.747 ; 45.085,-21.89 cw(c46.228,-21.89) 46.228,-20.747 ; 45.085,1.27 ccw(c46.228,1.27) 46.228,0.127 ; 45.085,1.27 ccw(c46.228,1.27) 46.228,0.127 ; 45.085,1.27 45.085,32.512 ; 45.085,1.27 45.085,32.512 ; 45.085,32.512 cw(c50.165,32.512) 50.165,37.592 ; 45.085,32.512 cw(c50.165,32.512) 50.165,37.592 ; 46.228,-20.747 ccw(c46.228,-19.604) 47.371,-19.604 ; 46.228,-20.747 ccw(c46.228,-19.604) 47.371,-19.604 ; 46.228,0.127 cw(c46.228,-1.016) 47.371,-1.016 ; 46.228,0.127 cw(c46.228,-1.016) 47.371,-1.016 ; 47.371,-19.604 47.371,-1.016 ; 47.371,-19.604 47.371,-1.016 ; 50.165,-58.293 79.629,-58.293 ; 50.165,-58.293 79.629,-58.293 ; 50.165,37.592 80.183,37.592 ; 50.165,37.592 80.183,37.592 ; 79.629,-58.293 ccw(c79.629,-57.15) 80.772,-57.15 ; 79.629,-58.293 ccw(c79.629,-57.15) 80.772,-57.15 ; 80.183,37.592 cw(c80.183,36.449) 81.326,36.449 ; 80.183,37.592 cw(c80.183,36.449) 81.326,36.449 ; 80.772,-57.15 cw(c81.788,-57.15) 81.788,-56.134 ; 80.772,-57.15 cw(c81.788,-57.15) 81.788,-56.134 ; 81.326,36.449 ccw(c82.469,36.449) 82.469,35.306 ; 81.326,36.449 ccw(c82.469,36.449) 82.469,35.306 ; 81.788,-56.134 100.838,-56.134 ; 81.788,-56.134 100.838,-56.134 ; 82.469,35.306 100.457,35.306 ; 82.469,35.306 100.457,35.306 ; 100.457,35.306 ccw(c100.457,36.449) 101.6,36.449 ; 100.457,35.306 ccw(c100.457,36.449) 101.6,36.449 ; 100.838,-56.134 cw(c100.838,-57.15) 101.854,-57.15 ; 100.838,-56.134 cw(c100.838,-57.15) 101.854,-57.15 ; 101.6,36.449 cw(c102.743,36.449) 102.743,37.592 ; 101.6,36.449 cw(c102.743,36.449) 102.743,37.592 ; 101.854,-57.15 ccw(c102.997,-57.15) 102.997,-58.293 ; 101.854,-57.15 ccw(c102.997,-57.15) 102.997,-58.293 ; 102.743,37.592 130.175,37.592 ; 102.743,37.592 130.175,37.592 ; 102.997,-58.293 130.175,-58.293 ; 102.997,-58.293 130.175,-58.293 ; 130.175,-58.293 ccw(c130.175,-53.213) 135.255,-53.213 ; 130.175,-58.293 ccw(c130.175,-53.213) 135.255,-53.213 ; 130.175,37.592 cw(c130.175,32.512) 135.255,32.512 ; 130.175,37.592 cw(c130.175,32.512) 135.255,32.512 ; 132.969,-19.812 ccw(c134.111,-19.81) 134.113,-20.953 ; 132.969,-19.812 ccw(c134.111,-19.81) 134.113,-20.953 ; 132.969,-19.812 132.969,-1.27 ; 132.969,-19.812 132.969,-1.27 ; 132.969,-1.27 cw(c134.112,-1.27) 134.112,-0.127 ; 132.969,-1.27 cw(c134.112,-1.27) 134.112,-0.127 ; 134.112,-20.955 cw(c134.112,-22.098) 135.255,-22.098 ; 134.112,-20.955 cw(c134.112,-22.098) 135.255,-22.098 ; 134.112,-20.955 134.113,-20.953 ; 134.112,-20.955 134.113,-20.953 ; 134.112,-0.127 ccw(c134.112,1.016) 135.255,1.016 ; 134.112,-0.127 ccw(c134.112,1.016) 135.255,1.016 ; 135.255,-53.213 135.255,-22.098 ; 135.255,-53.213 135.255,-22.098 ; 135.255,1.016 135.255,32.512 ; 135.255,1.016 135.255,32.512

## Silkscreen, mask and mechanical layers (free items; w line width, h text height)
F.SilkS:
  circle w0.15: c122.809,35.052 r0.568
  lines w0.08: 102.431,-57.785 114.231,-57.785
  text "B" at 113.229,12.031 h1.5
  text "A" at 113.199,-15.277 h1.5
  text "A" at 64.05,-30.644 h1.5
  text "B" at 97.989,-30.768 h1.5
  text "SN:________________" at 86.241,-55.196 h1
  text "Magyarosaurous" at 102.231,-57.464 h1
  text "MTR-DB-REVA" at 69.088,-57.559 h1
B.SilkS:
  text "A" at 84.215,-35.077 h1
  text "B" at 97.912,-35.075 h1
  text "Liam Herbert Ivanna Boras John Timpson" at 97.168,-52.893 h1.5

## Dimensions
135.255,-58.293 to 130.175,-58.293 on F.Fab
135.255,-58.293 to 135.255,-53.213 on F.Fab
45.085,37.592 to 45.085,32.512 on F.Fab
45.085,37.592 to 135.255,37.592 on F.Fab
45.085,37.592 to 53.975,37.592 on F.Fab
45.085,-58.293 to 50.165,-58.293 on F.Fab
45.085,37.592 to 45.085,-58.293 on F.Fab
45.085,37.592 to 127.635,37.592 on F.Fab
45.085,-58.293 to 45.085,-53.213 on F.Fab

## Text inside footprints (layer, text, board x,y; h text height)
J1: F.SilkS "H1" at 124.853,27.79 h1; F.SilkS "H2" at 124.817,24.612 h1
U1: F.SilkS "Y COIL" at 116.804,-41.985 h1 r90; F.SilkS "X COIL" at 106.682,-33.427 h1
U2: B.SilkS "Z COIL" at 124.509,19.651 h1